# Altium PCB IO以及接线说明.PcbDoc
Units mm, origin at the board's own origin, x right, y up, seen from the top; angles counter-clockwise.
Board outline 55.98 x 90.32 mm, 2 copper layers (Top Layer, Bottom Layer); 6 components, 171 nets, 136 pads, 0 vias.
Unrouted connection lines stored in the file: 405.
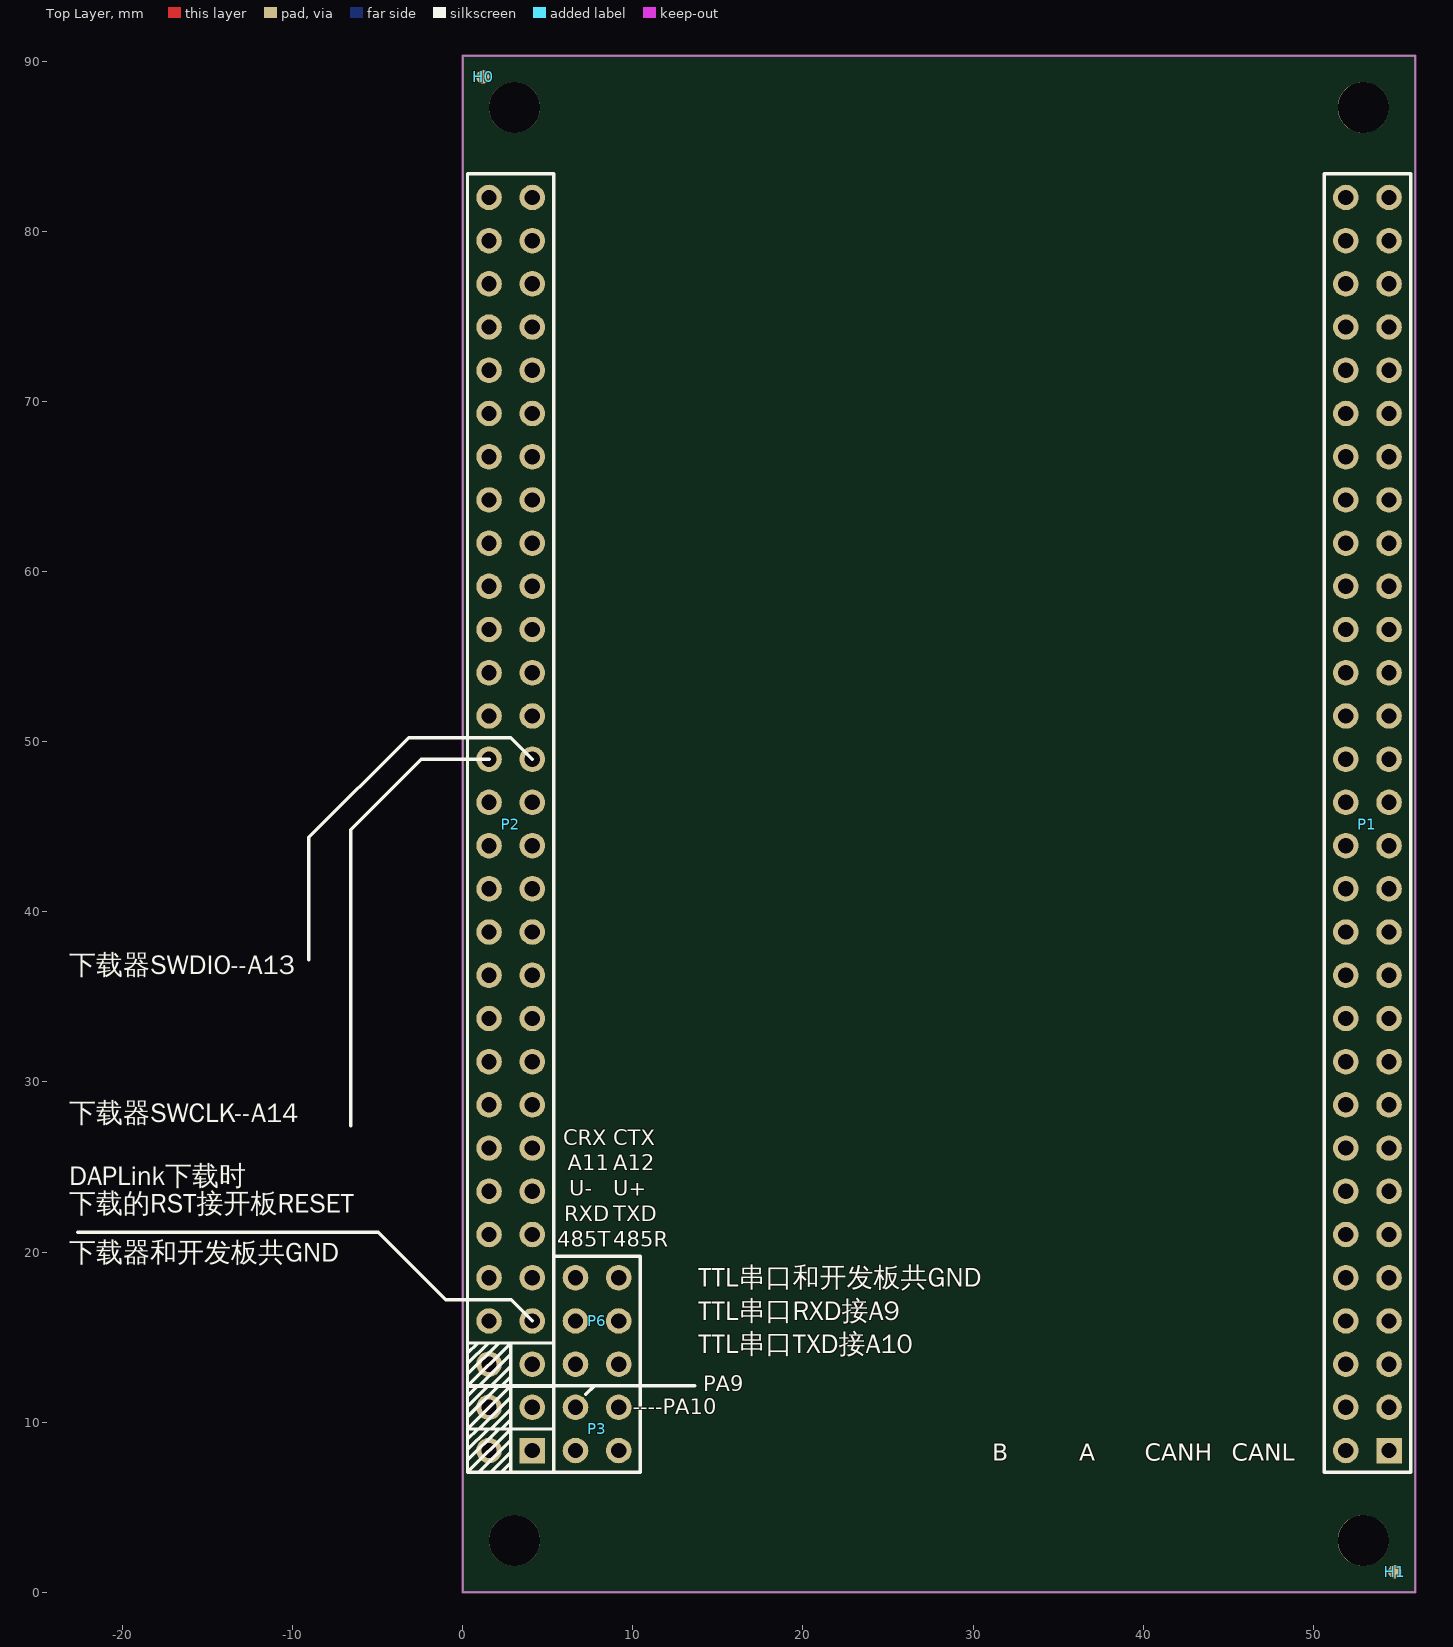
[diagram p0: Top Layer view]
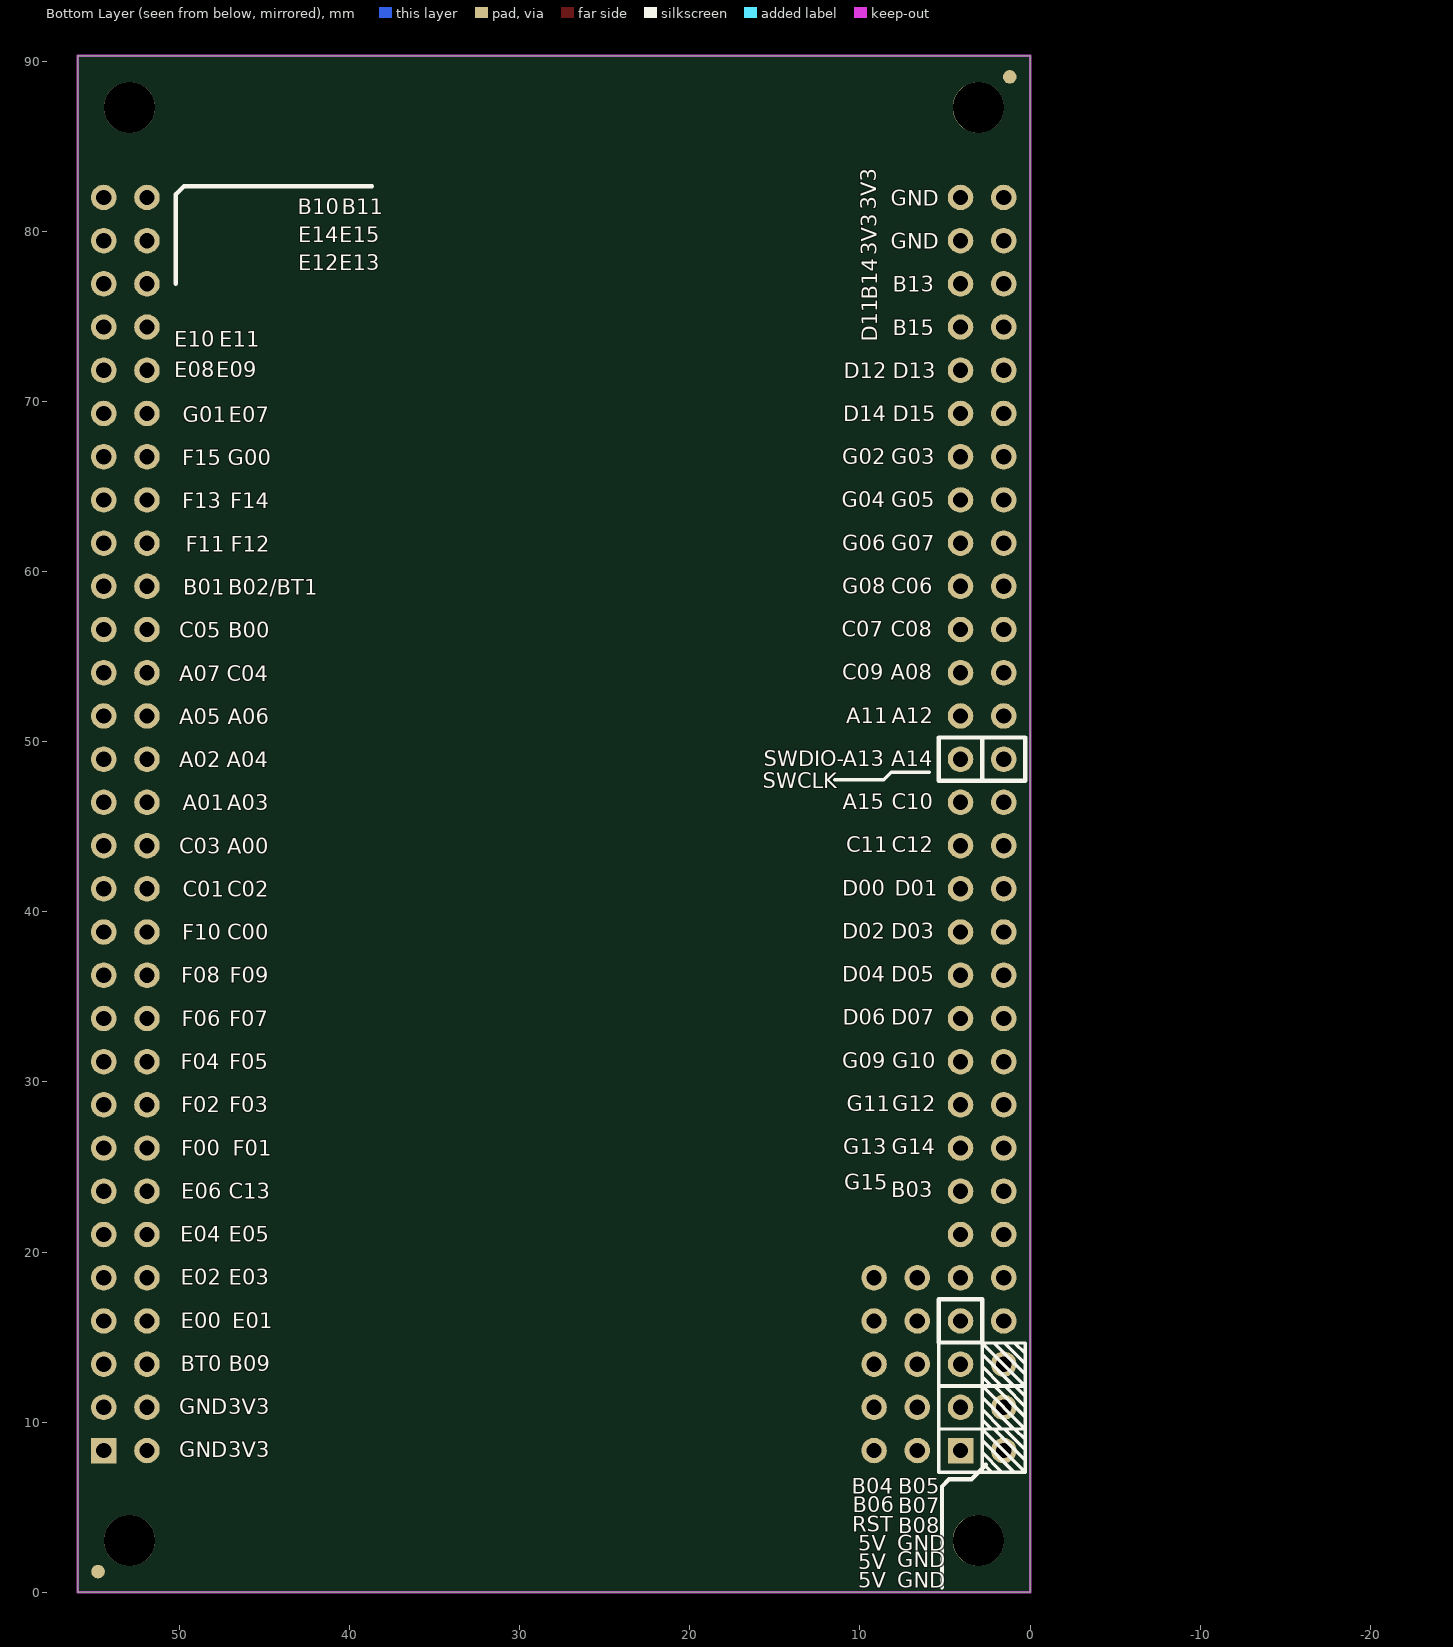
[diagram p1: Bottom Layer view, seen from below]

## Layer stack, top to bottom
Top Layer: signal copper 0.0356
Dielectric: dielectric 0.32, FR-4, Dk 4.8
Bottom Layer: signal copper 0.0356

## Board outline
14.58,0 0,0 0,4.826 0,90.322 7.62,90.322 55.982,90.322 55.982,86.741 55.982,0 52.349,0

## Design rules (kind name [scope] priority, off if disabled: settings)
Clearance Clearance_1 [All] p1: gap=0.35
ComponentClearance [All] p1 off: gap=0.254 collisioncheckmode=3 verticalgap=0.254
DiffPairsRouting [All] p1 off: maxlimit=0.254 minlimit=0.254 mostfreqgap=0.254 maxuncoupledlength=12.7
FanoutControl Fanout_BGA [IsBGA] p1 off: bgadir=Out bgaviamode=Centered fanoutstyle=Auto fanoutdirection=Alternating viagrid=0.025 // Fanout_BGA (Default Rule)
FanoutControl Fanout_LCC [IsLCC] p2 off: bgadir=Out bgaviamode=Centered fanoutstyle=Auto fanoutdirection=Alternating viagrid=0.025 // Fanout_LCC (Default Rule)
FanoutControl Fanout_Small [(CompPinCount < 5)] p4 off: bgadir=Out bgaviamode=Centered fanoutstyle=Auto fanoutdirection=OutThenIn viagrid=0.025 // Fanout_Small (Default Rule)
Height [All] p1 off: minheight=0 maxheight=25.4 prefheight=12.7
HoleSize [All] p1: absolutevalues=TRUE maxlimit=5 minlimit=0.3 maxpercent=80.000 minpercent=20.000
PasteMaskExpansion [All] p1 off: expansion=0
PlaneClearance [All] p1 off: clearance=0.508
PlaneConnect PlaneConnect_1 [All] p1: planeconnectstyle=Relief reliefexpansion=0.508 reliefentries=4 reliefconductorwidth=0.254 reliefairgap=0.254
PlaneConnect "Power Plane Connect Style - pads with no thermal" [(Name='CN1-3') Or (Name='CN1-4') Or (Name='CN2-3') Or (Name='CN2-4') Or (Name='J3-5') Or (Name='J3-6') Or (Name='S101-3') Or (Name='S101-4')] p2 off: planeconnectstyle=NoConnect reliefexpansion=0.508 reliefentries=4 reliefconductorwidth=0.254 reliefairgap=0.254 // PAD - No Thermal Connect Rule
PlaneConnect AGND_ViaConnect [InNet('AGND')] p3 off: planeconnectstyle=Direct reliefexpansion=0.508 reliefentries=4 reliefconductorwidth=0.254 reliefairgap=0.254
PolygonConnect PolygonConnect_1 [(InPadClass('All Pads'))] p1: connectstyle=Relief reliefconductorwidth=0.4 reliefentries=4 polygonreliefangle="90 Angle"
PolygonConnect [All] p2: connectstyle=Direct reliefconductorwidth=0.254 reliefentries=4 polygonreliefangle="90 Angle"
RoutingVias [All] p1: holewidth=0.3 width=0.5 viastyle="Through Hole" minholewidth=0.3 minwidth=0.5 maxholewidth=0.3 maxwidth=0.5
ShortCircuit AGND&GND [InNet('GND') vs InNet('AGND')] p1: allowed=TRUE
ShortCircuit [All] p2: allowed=FALSE
SolderMaskExpansion [All] p1 off: expansion=0.102
TestPointUsage FabricationTestPointUsage [All] p1 off: valid=0 allowmultiple=FALSE
Testpoint FabricationTestpoint [(IsPad And (OnTopLayer Or OnBottomLayer))] p1: side=3 testpointundercomponent=TRUE minsize=1.016 maxsize=2.54 preferedsize=1.524 minholesize=0 maxholesize=1.016 preferedholesize=0.813 testpointgrid=0.025 style=297 order=0-112345678
Width Width_5 [All] p1: maxlimit=0.254 minlimit=0.254 preferedwidth=0.254
Width Width_3 [All] p2: maxlimit=0.254 minlimit=0.254 preferedwidth=0.254
Width Width_2 [InNet('VBAT')] p3: maxlimit=1.254 minlimit=1.254 preferedwidth=1.254
Width Width_1 [InNet('NetCI5_2')] p4: maxlimit=1 minlimit=1 preferedwidth=1
Width PowerNet [InNetClass('Power Class')] p5: maxlimit=5 minlimit=0.3 preferedwidth=0.5
Width [All] p6: maxlimit=5 minlimit=0.2 preferedwidth=0.254
8 further rules are at their usual default settings.

## Components (designator, comment, footprint, x,y, rotation, side; value= is the part's Value field where it differs from the comment)
H0 "HOLE" HOLE 1.194,89.078 r0 top
H1 "HOLE" HOLE 54.788,1.219 r0 top
P1 "Header 30X2" HDR2X30 54.45,8.331 r90 top locked
P2 "Header 30X2" HDR2X30 4.089,8.331 r90 top locked
P3 "USART1" HDR2X2 6.629,10.871 r270 top
P6 "USB/CAN" HDR2X3L 6.629,18.491 r270 top

## Footprints (in the part's own frame and the unit in brackets; to place one, negate y for a bottom-side part, rotate by r counter-clockwise, add the part's x,y. Pads: shape width x height; smd on the part's side, far side on the other; paste and mask are expansions set on the pad)
HDR2X2 [mm]
  round 1.5 hole 0.9: 1(0,0) 2(0,2.54) 3(2.54,0) 4(2.54,2.54)
  silkscreen extent -1.27,-1.27 3.81,3.81, body extent -1.27,-1.17 3.81,3.91, height 8.5
HDR2X3L [mm]
  round 1.5 hole 0.9: 1(0,0) 2(0,2.54) 3(2.54,0) 4(2.54,2.54) 5(5.08,0) 6(5.08,2.54)
  silkscreen extent -1.27,-1.27 6.35,3.81, body extent -1.27,-1.27 6.35,3.81, height 8.5
HDR2X30 [mm] "Connector; Header; 30x2 Position"
  rect 1.5x1.5 hole 0.9: 1(0,0)
  round 1.5 hole 0.9: 2(0,2.54) 3(2.54,0) 4(2.54,2.54) 5(5.08,0) 6(5.08,2.54) 7(7.62,0) 8(7.62,2.54) 9(10.16,0) 10(10.16,2.54) 11(12.7,0) 12(12.7,2.54) 13(15.24,0) 14(15.24,2.54) 15(17.78,0) 16(17.78,2.54) 17(20.32,0) 18(20.32,2.54) 19(22.86,0) 20(22.86,2.54) 21(25.4,0) 22(25.4,2.54) 23(27.94,0) 24(27.94,2.54) 25(30.48,0) 26(30.48,2.54) 27(33.02,0) 28(33.02,2.54) 29(35.56,0) 30(35.56,2.54) 31(38.1,0) 32(38.1,2.54) 33(40.64,0) 34(40.64,2.54) 35(43.18,0) 36(43.18,2.54) 37(45.72,0) 38(45.72,2.54) 39(48.26,0) 40(48.26,2.54) 41(50.8,0) 42(50.8,2.54) 43(53.34,0) 44(53.34,2.54) 45(55.88,0) 46(55.88,2.54) 47(58.42,0) 48(58.42,2.54) 49(60.96,0) 50(60.96,2.54) 51(63.5,0) 52(63.5,2.54) 53(66.04,0) 54(66.04,2.54) 55(68.58,0) 56(68.58,2.54) 57(71.12,0) 58(71.12,2.54) 59(73.66,0) 60(73.66,2.54)
  silkscreen extent -1.27,-1.27 75.06,3.81
HOLE [mm]
  round 0.8 all layers, no hole: 0(0,0)

## Part data
P1 P2: "Header, 30-Pin, Dual row"
P3 P6: library part "Header 3X2", "Header, 3-Pin, Dual row"

## Free pads (board coordinates)
  round 3 hole 3: 0(3.046,3.046) 0(3.046,87.277) 0(52.936,3.046) 0(52.936,87.277)

## Nets (pads, with @x,y where several pads share a name; then routed paths per layer and width w, separated by ;. In a path a pad name is that pad's centre, name@x,y a point inside that pad or via, vN(x,y) a via of type N, cw(c..) or ccw(c..) an arc to the next point about the centre after c; other vN are vias at no path point)
ACT_LED: 
ADC: 
BOOT0: P1.5
BOOT1: P1.42
CAN_RX: P6.1
CAN_TX: P6.2
CH_PD: 
D+: 
D-: 
ESP_REST: 
ESP_RXD: 
ESP_TXD: 
F_CS: 
GBC_RX: P1.59
GBC_TX: P1.60
GND: P1.1 P1.3 P2.2 P2.4 P2.6 P2.58 P2.60
GP02: 
GP04: 
GP05: 
GP12: 
GP13: 
GP14: 
GP16: 
IIC_SCL: P2.9
IIC_SDA: P2.10
JTCK: P2.34
JTDI: P2.31
JTDO: P2.14
JTMS: P2.33
JTRST: P2.11
KEY0: P1.11
KEY1: P1.10
LCD_BL: P1.40
LED0: P2.8
LED1: P1.12
LIGHT_SENSOR: P1.23
LINK_LED: 
NetBAT_1: 
NetC3_2: 
NetC4_2: 
NetC5_2: 
NetC6_2: 
NetC7_2: 
NetC46_1: 
NetC66_1: 
NetC67_1: 
NetC68_2: 
NetC69_2: 
NetC70_1: 
NetC70_2: 
NetC71_1: 
NetC71_2: 
NetCAN_1: 
NetCAN_2: 
NetDS0_1: 
NetESP_10: 
NetESP_12: 
NetJP1_1: 
NetJP1_2: 
NetP6_5: P6.5
NetP6_6: P6.6
NetPWR_1: 
NetR4_1: 
NetR14_1: 
NetR17_1: 
NetR22_2: 
NetR83_1: 
NetR85_2: 
OV_VSYNC: P2.38
PA0: P1.30
PA1: P1.31
PA2: P1.33
PA3: P1.32
PA4: P1.34
PA5: P1.35
PA6: P1.36
PA7: P1.37
PA9: P3.1
PA10: P3.2
PA11: P2.35 P6.3
PA12: P2.36 P6.4
PB1: P1.41
PB5: P2.12
PB9: P1.6
PB13: P2.56
PB14: P2.55
PB15: P2.54
PC0: P1.26
PC1: P1.27
PC2: P1.28
PC3: P1.29
PC4: P1.38
PC5: P1.39
PC6: P2.42
PC7: P2.39
PC8: P2.40
PC9: P2.37
PC10: P2.32
PC11: P2.29
PC12: P2.30
PC13: P1.14
PD0: P2.27
PD1: P2.28
PD2: P2.25
PD3: P2.26
PD4: P2.23
PD5: P2.24
PD6: P2.21
PD7: P2.22
PD8: 
PD9: 
PD10: 
PD11: P2.53
PD12: P2.51
PD13: P2.52
PD14: P2.49
PD15: P2.50
PE0: P1.7
PE1: P1.8
PE2: P1.9
PE6: P1.13
PE7: P1.50
PE8: P1.51
PE9: P1.52
PE10: P1.53
PE11: P1.54
PE12: P1.55
PE13: P1.56
PE14: P1.57
PE15: P1.58
PF0: P1.15
PF1: P1.16
PF2: P1.17
PF3: P1.18
PF4: P1.19
PF5: P1.20
PF6: P1.21
PF7: P1.22
PF9: P1.24
PF10: P1.25
PF11: P1.43
PF12: P1.44
PF13: P1.45
PF14: P1.46
PF15: P1.47
PG0: P1.48
PG1: P1.49
PG2: P2.47
PG3: P2.48
PG4: P2.45
PG5: P2.46
PG6: P2.43
PG7: P2.44
PG8: P2.41
PG9: P2.19
PG10: P2.20
PG11: P2.17
PG12: P2.18
PG13: P2.15
PG14: P2.16
PG15: P2.13
RESET: P2.7
RS485_RX: P3.4
RS485_TX: P3.3
SDIO_CMD: 
VBTN: P2.1 P2.3 P2.5
VCC3.3: P1.2 P1.4 P2.57 P2.59
VCC3.3M: 
VCC_3.3V: 
VDDA: 
VUSB: 
pads on no net: H0.0 H1.0

## Keep-outs
Keep-Out Layer:
  lines w0.15: 0,0 55.982,0 55.982,90.322 0,90.322 0,0

## Silkscreen, mask and mechanical layers (free items; w line width, h text height)
Top Overlay:
  lines w0.2: -22.631,21.158 -4.953,21.158 -0.991,17.196 2.845,17.196 4.089,15.951 ; -9.042,37.186 -9.042,44.374 -3.175,50.241 2.819,50.241 4.089,48.971 ; -6.579,27.432 -6.579,44.831 -2.438,48.971 1.549,48.971 ; 0.279,7.768 2.108,9.597 ; 0.279,8.378 1.499,9.597 ; 0.279,8.987 0.889,9.597 ; 0.279,10.304 2.108,12.133 ; 0.279,10.914 1.499,12.133 ; 0.279,11.523 0.889,12.133 ; 0.279,12.823 2.108,14.652 ; 0.279,13.432 1.499,14.652 ; 0.279,14.042 0.889,14.652 ; 0.944,7.061 2.819,8.937 ; 0.944,9.597 2.819,11.472 ; 0.944,12.116 2.819,13.991 ; 1.655,7.061 2.819,8.225 ; 1.655,9.597 2.819,10.761 ; 1.655,12.116 2.819,13.28 ; 2.261,7.061 2.815,7.616 ; 2.261,9.597 2.815,10.152 ; 2.261,12.116 2.815,12.67 ; 2.815,9.597 0.279,7.061 ; 2.815,12.133 0.279,9.597 ; 2.815,14.652 0.279,12.116 ; 2.819,7.061 2.819,9.597 2.819,12.133 ; 2.819,12.116 2.819,14.652 ; 7.239,11.633 7.747,12.141 11.735,12.141 13.64,12.141 ; 0.279,7.061 0.279,9.597 ; 0.279,7.061 5.359,7.061 5.359,9.597 ; 0.279,9.597 5.359,9.597 ; 0.279,9.597 0.279,12.133 5.359,12.133 5.359,9.597 ; 0.279,9.597 5.359,9.597 ; 0.279,12.116 0.279,14.652 5.359,14.652 5.359,12.116 0.279,12.116
  text "下载器SWDIO--A13" at -23.114,35.941 h2
  text "下载器SWCLK--A14" at -23.114,27.254 h2
  text "CRX" at 5.922,26.289 h0.9
  text "CTX" at 8.839,26.289 h0.9
  text "A11" at 6.186,24.797 h0.9
  text "A12" at 8.839,24.797 h0.9
  text "DAPLink下载时" at -23.114,23.546 h2
  text "U-" at 6.261,23.304 h0.9
  text "U+" at 8.839,23.304 h0.9
  text "下载的RST接开板RESET" at -23.114,21.92 h2
  text "RXD" at 5.969,21.812 h0.9
  text "TXD" at 8.839,21.812 h0.9
  text "485T" at 5.569,20.32 h0.9
  text "485R" at 8.839,20.32 h0.9
  text "下载器和开发板共GND" at -23.114,19.05 h2
  text "TTL串口和开发板共GND" at 13.843,17.577 h2
  text "TTL串口RXD接A9" at 13.843,15.614 h2
  text "TTL串口TXD接A10" at 13.843,13.665 h2
  text "PA9" at 14.148,11.811 h0.9
  text "----PA10" at 10.008,10.465 h0.9
  text "B" at 31.14,7.747 h1
  text "A" at 36.246,7.747 h1
  text "CANL" at 45.212,7.747 h1
  text "CANH" at 40.081,7.722 h1
Bottom Overlay:
  lines w0.2: 0.279,7.768 2.108,9.597 ; 0.279,8.378 1.499,9.597 ; 0.279,8.987 0.889,9.597 ; 0.279,10.304 2.108,12.133 ; 0.279,10.914 1.499,12.133 ; 0.279,11.523 0.889,12.133 ; 0.279,12.823 2.108,14.652 ; 0.279,13.432 1.499,14.652 ; 0.279,14.042 0.889,14.652 ; 0.944,7.061 2.819,8.937 ; 0.944,9.597 2.819,11.472 ; 0.944,12.116 2.819,13.991 ; 1.655,7.061 2.819,8.225 ; 1.655,9.597 2.819,10.761 ; 1.655,12.116 2.819,13.28 ; 2.261,7.061 2.815,7.616 ; 2.261,9.597 2.815,10.152 ; 2.261,12.116 2.815,12.67 ; 2.815,9.597 0.279,7.061 ; 2.815,12.133 0.279,9.597 ; 2.815,14.652 0.279,12.116 ; 2.819,7.061 2.819,9.597 2.819,12.133 ; 2.819,12.116 2.819,14.652 ; 5.918,48.209 8.153,48.209 8.611,47.752 11.481,47.752 ; 0.279,7.061 5.359,7.061 5.359,9.597 ; 0.279,7.061 0.279,9.597 ; 0.279,9.597 5.359,9.597 ; 0.279,9.597 5.359,9.597 ; 0.279,9.597 0.279,12.133 5.359,12.133 5.359,9.597 ; 0.279,12.116 5.359,12.116 5.359,14.652 0.279,14.652 0.279,12.116
  lines w0.254: 2.591,7.493 3.443,6.641 4.763,6.641 5.182,6.223 5.182,0.305 ; 38.684,82.652 49.733,82.652 50.216,82.169 50.216,76.911 ; 2.819,47.701 5.359,47.701 5.359,50.241 2.819,50.241 ; 2.819,47.701 2.819,50.241 ; 2.819,47.701 2.819,50.241 ; 2.819,47.701 0.279,47.701 0.279,50.241 2.819,50.241 ; 2.819,14.681 5.359,14.681 5.359,17.221 2.819,17.221 2.819,14.681
  text "GND" at 8.196,81.509 h0.9
  text "3V3" at 9.042,81.28 h0.9 r270
  text "B11" at 40.469,81.001 h0.9
  text "B10" at 43.057,81.001 h0.9
  text "E15" at 40.615,79.362 h0.9
  text "E14" at 43.031,79.362 h0.9
  text "GND" at 8.196,78.974 h0.9
  text "3V3" at 9.017,78.588 h0.9 r270
  text "E13" at 40.615,77.724 h0.9
  text "E12" at 43.01,77.724 h0.9
  text "B13" at 8.078,76.439 h0.9
  text "B14" at 8.992,75.971 h0.9 r270
  text "B15" at 8.078,73.904 h0.9
  text "D11" at 8.992,73.508 h0.9 r270
  text "E11" at 47.665,73.216 h0.9
  text "E10" at 50.304,73.216 h0.9
  text "E09" at 47.831,71.417 h0.9
  text "E08" at 50.298,71.417 h0.9
  text "D13" at 8.078,71.37 h0.9
  text "D12" at 10.958,71.37 h0.9
  text "D15" at 8.078,68.835 h0.9
  text "D14" at 10.98,68.835 h0.9
  text "E07" at 47.09,68.78 h0.9
  text "G01" at 49.795,68.78 h0.9
  text "G03" at 8.172,66.3 h0.9
  text "G02" at 11.053,66.3 h0.9
  text "G00" at 47.161,66.244 h0.9
  text "F15" at 49.823,66.244 h0.9
  text "G05" at 8.172,63.765 h0.9
  text "G04" at 11.074,63.765 h0.9
  text "F14" at 47.018,63.708 h0.9
  text "F13" at 49.823,63.708 h0.9
  text "G07" at 8.172,61.231 h0.9
  text "G06" at 11.031,61.231 h0.9
  text "F12" at 46.996,61.173 h0.9
  text "F11" at 49.63,61.173 h0.9
  text "C06" at 8.174,58.696 h0.9
  text "G08" at 11.053,58.696 h0.9
  text "B02/BT1" at 47.138,58.637 h0.9
  text "B01" at 49.772,58.637 h0.9
  text "C08" at 8.196,56.161 h0.9
  text "C07" at 11.076,56.161 h0.9
  text "B00" at 47.138,56.102 h0.9
  text "C05" at 50.012,56.102 h0.9
  text "A08" at 8.196,53.626 h0.9
  text "C09" at 11.055,53.626 h0.9
  text "C04" at 47.206,53.566 h0.9
  text "A07" at 50.012,53.566 h0.9
  text "A12" at 8.125,51.092 h0.9
  text "A11" at 10.813,51.092 h0.9
  text "A06" at 47.163,51.03 h0.9
  text "A05" at 50.012,51.03 h0.9
  text "A14" at 8.146,48.557 h0.9
  text "A13" at 11.006,48.557 h0.9
  text "SWDIO-" at 15.646,48.557 h0.9
  text "A04" at 47.206,48.495 h0.9
  text "A02" at 50.012,48.495 h0.9
  text "SWCLK" at 15.723,47.269 h0.9
  text "C10" at 8.125,46.022 h0.9
  text "A15" at 11.006,46.022 h0.9
  text "A03" at 47.185,45.959 h0.9
  text "A01" at 49.819,45.959 h0.9
  text "C12" at 8.125,43.487 h0.9
  text "C11" at 10.813,43.487 h0.9
  text "A00" at 47.185,43.423 h0.9
  text "C03" at 50.012,43.423 h0.9
  text "D01" at 7.956,40.953 h0.9
  text "D00" at 11.029,40.953 h0.9
  text "C02" at 47.185,40.888 h0.9
  text "C01" at 49.819,40.888 h0.9
  text "D03" at 8.149,38.418 h0.9
  text "D02" at 11.029,38.418 h0.9
  text "C00" at 47.185,38.352 h0.9
  text "F10" at 49.823,38.352 h0.9
  text "D05" at 8.149,35.883 h0.9
  text "D04" at 11.051,35.883 h0.9
  text "F09" at 47.045,35.817 h0.9
  text "F08" at 49.894,35.817 h0.9
  text "D07" at 8.149,33.348 h0.9
  text "D06" at 11.008,33.348 h0.9
  text "F07" at 47.067,33.281 h0.9
  text "F06" at 49.872,33.281 h0.9
  text "G10" at 8.101,30.814 h0.9
  text "G09" at 11.031,30.814 h0.9
  text "F05" at 47.067,30.745 h0.9
  text "F04" at 49.915,30.745 h0.9
  text "G12" at 8.101,28.279 h0.9
  text "G11" at 10.789,28.279 h0.9
  text "F03" at 47.067,28.21 h0.9
  text "F02" at 49.894,28.21 h0.9
  text "G14" at 8.123,25.744 h0.9
  text "G13" at 10.982,25.744 h0.9
  text "F01" at 46.874,25.674 h0.9
  text "F00" at 49.894,25.674 h0.9
  text "G15" at 10.922,23.673 h0.9
  text "B03" at 8.149,23.209 h0.9
  text "C13" at 47.114,23.139 h0.9
  text "E06" at 49.896,23.139 h0.9
  text "E05" at 47.09,20.603 h0.9
  text "E04" at 49.939,20.603 h0.9
  text "E03" at 47.09,18.067 h0.9
  text "E02" at 49.917,18.067 h0.9
  text "E01" at 46.898,15.532 h0.9
  text "E00" at 49.917,15.532 h0.9
  text "B09" at 47.116,12.996 h0.9
  text "BT0" at 49.917,12.996 h0.9
  text "3V3" at 47.138,10.46 h0.9
  text "GND" at 50.012,10.46 h0.9
  text "3V3" at 47.138,7.925 h0.9
  text "GND" at 50.012,7.925 h0.9
  text "B05" at 7.747,5.79 h0.9
  text "B04" at 10.47,5.79 h0.9
  text "B06" at 10.427,4.699 h0.9
  text "B07" at 7.747,4.648 h0.9
  text "RST" at 10.449,3.556 h0.9
  text "B08" at 7.747,3.48 h0.9
  text "GND" at 7.794,2.438 h0.9
  text "5V" at 10.091,2.438 h0.9
  text "GND" at 7.794,1.473 h0.9
  text "5V" at 10.091,1.346 h0.9
  text "GND" at 7.794,0.279 h0.9
  text "5V" at 10.091,0.279 h0.9
Mechanical 15:
  drawing of 37546 lines, arcs and shapes, not listed
  text "w w w . o p e n e d v . c o m}" at -414.369,-123.852 h0.02
  text "w w w . o p e n e d v . c o m}" at -414.449,-124.054 h0.02
  text "187,44" at -413.807,-124.296 h0.02

## Text inside footprints (layer, text, board x,y; h text height)
P1: Bottom Overlay "1" at 54.958,-47.549 h1.27 r90
P2: Bottom Overlay "1" at 4.597,-47.549 h1.27 r90